# Altium PCB waffling80-NMB-USB.PcbDoc
Units mm, origin at the board's own origin, x right, y up, seen from the top; angles counter-clockwise.
Board outline 10.25 x 14.02 mm, 2 copper layers (Component Side, Bottom Layer), stack 1.171 mm thick; 4 components, 6 nets, 28 pads, 14 vias.
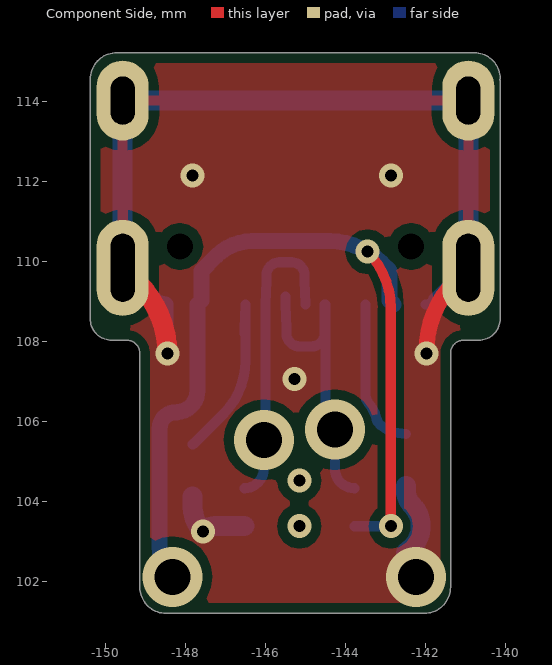
[diagram p0: Component Side view]
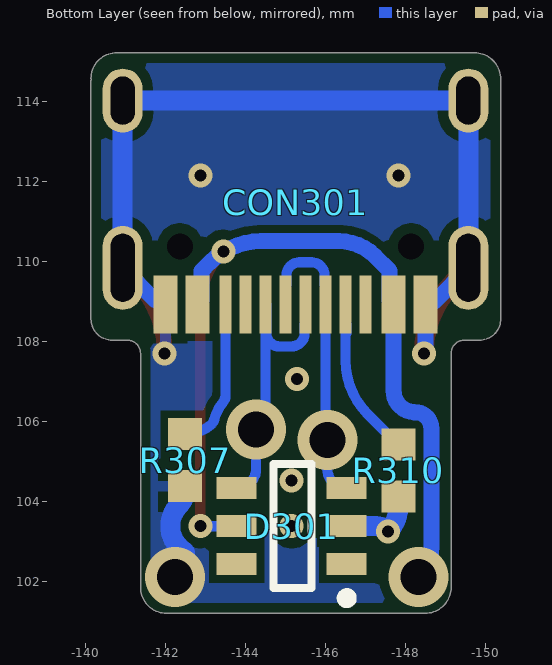
[diagram p1: Bottom Layer view, seen from below]

## Layer stack, top to bottom
Top Solder: solder mask 0.0102, Solder Resist, Dk 3.5
Component Side: signal copper 0.0356
Dielectric 1: core 1.1, FR-4, Dk 4.2
Bottom Layer: signal copper 0.0356
Solder Side: solder mask 0.0102, Solder Resist, Dk 3.5

## Board outline
-149.86,108.027 -149.479,108.027 cw(c-149.479,107.696) -149.148,107.696 -149.148,101.851 ccw(c-148.494,101.851) -148.494,101.197 -142.036,101.197 ccw(c-142.036,101.851) -141.381,101.851 -141.381,107.696 cw(c-141.051,107.696) -141.051,108.027 -140.67,108.027 ccw(c-140.67,108.554) -140.143,108.554 -140.143,114.513 ccw(c-140.193,114.513) -140.151,114.54 ccw(c-140.193,114.568) -140.142,114.568 ccw(c-140.786,114.568) -140.786,115.212 -149.726,115.212 ccw(c-149.726,114.551) -150.387,114.551 ccw(c-150.336,114.551) -150.383,114.533 ccw(c-150.337,114.513) -150.387,114.513 -150.387,108.554 ccw(c-149.86,108.554)

## Design rules (kind name [scope] priority, off if disabled: settings)
BoardOutlineClearance [All] p1: gap=0.254 ignorepadtopadclearanceinfootprint=FALSE except(0: Arc-SplitContinuation Track-SplitContinuation SMDPad-SplitContinuation THPad-SplitContinuation Via-SplitContinuation Fill-SplitContinuation Poly-SplitContinuation Region-SplitContinuation Text-SplitContinuation)
Clearance [All] p1: gap=0.2 ignorepadtopadclearanceinfootprint=FALSE except(0: Arc-Hole Track-Hole SMDPad-Hole THPad-Hole Via-Hole Fill-Hole Poly-Hole Region-Hole Text-Hole; 0.254: THPad-THPad THPad-Via THPad-Fill THPad-Poly THPad-Region THPad-Text Via-Via Via-Fill Via-Poly Via-Region Via-Text Fill-Fill Fill-Poly Fill-Region Fill-Text Poly-Poly Poly-Region Poly-Text Region-Region Region-Text Text-Text)
ComponentClearance [InComponent('No Component') And OnLayer('Component Side')] p1: gap=0.254 collisioncheckmode=3 verticalgap=0.254 showdistances=FALSE
DiffPairsRouting DiffPairsRouting_USB [InDifferentialPairClass('All Differential Pairs')] p1: maxlimit=0.254 minlimit=0.203 mostfreqgap=0.203 toplayer_minwidth=0.152 toplayer_maxwidth=0.381 toplayer_prefwidth=0.152 bottomlayer_minwidth=0.152 bottomlayer_maxwidth=0.381 bottomlayer_prefwidth=0.152 maxuncoupledlength=12.7
DiffPairsRouting [All] p2: maxlimit=0.254 minlimit=0.254 mostfreqgap=0.254 toplayer_minwidth=0.381 toplayer_maxwidth=0.381 toplayer_prefwidth=0.381 bottomlayer_minwidth=0.381 bottomlayer_maxwidth=0.381 bottomlayer_prefwidth=0.381 maxuncoupledlength=12.7
HoleSize [All] p1: absolutevalues=TRUE maxlimit=20 minlimit=0.025 maxpercent=80.000 minpercent=20.000
MatchedLengths MatchedLengths_USB_DiffPairs_1 [All] p1: tolerance=0.127 checknetsindiffpair=TRUE checkdiffpairvsdiffpair=FALSE checkxsignals=FALSE checkothers=FALSE
MatchedLengths MatchedLengths_USB_DiffPairs [All] p2: tolerance=0.127 checknetsindiffpair=TRUE checkdiffpairvsdiffpair=FALSE checkxsignals=FALSE checkothers=FALSE
PolygonConnect PolygonConnect_1 [All vs IsVia] p1: connectstyle=Direct reliefconductorwidth=0.254 reliefentries=4 polygonreliefangle="90 Angle" airgapwidth=0.254
PolygonConnect [All] p2: connectstyle=Relief reliefconductorwidth=0.254 reliefentries=4 polygonreliefangle="90 Angle" airgapwidth=0.254
RoutingVias [All] p1: holewidth=0.711 width=1.27 viastyle="Through Hole" minholewidth=0.711 minwidth=1.27 maxholewidth=0.711 maxwidth=1.27
SolderMaskExpansion [All] p1: expansion=0.102 istentingtop=FALSE
Width [All] p1: maxlimit=1 minlimit=0.203 preferedwidth=0.254 minimp=50.000000 maximp=50.000000 favimp=50.000000
27 further rules are at their usual default settings.

## Classes and differential pairs
differential pair D: +D_P -D_N

## Components (designator, comment, footprint, x,y, rotation, side; value= is the part's Value field where it differs from the comment)
CON301 "TYPE-C-31-M-12" TYPE-C-31-M-12 -145.257,108.92 r0 bottom
D301 "SRV05" SOT-23-6 -145.161,103.375 r0 bottom
R307 "Res1" R0603[1608] -142.494,105.026 r270 bottom value=5k1
R310 "Res1" R0603[1608] -147.828,104.772 r270 bottom value=5k1

## Footprints (in the part's own frame and the unit in brackets; to place one, negate y for a bottom-side part, rotate by r counter-clockwise, add the part's x,y. Pads: shape width x height; smd on the part's side, far side on the other; paste and mask are expansions set on the pad)
R0603[1608] [mm] "Chip Resistor, 2-Leads, Body 1,57x0,80mm, IPC Medium Density"
  rect 0.8x0.85 smd: 1(-0.65,0) 2(0.65,0)
  body extent -0.83,-0.43 0.82,0.43, height 0.5
SOT-23-6 [mm]
  rect 1x0.55 smd: 1(-1.375,0.95) 2(-1.375,0) 3(-1.375,-0.95) 4(1.375,-0.95) 5(1.375,0) 6(1.375,0.95)
  silkscreen extent -1.5,-1.55 0.46,1.92, body extent -1.37,-1.44 1.47,1.49, height 1.05
TYPE-C-31-M-12 [mm]
  rect 0.6x1.45 smd: A1B12(-3.25,0) A4B9(-2.45,0) B1A12(3.25,0) B4A9(2.45,0)
  rect 0.3x1.45 smd: A5(-1.25,0) A6(-0.25,0) A7(0.25,0) A8(1.25,0) B5(1.75,0) B6(0.75,0) B7(-0.75,0) B8(-1.75,0)
  oval 1x1.6 / inner oval 1x1.6 / far side oval 1.3x2 hole 0.6 slot 1.2 at 90 deg: S1(-4.32,-5.095) S1(4.32,-5.095)
  oval 1x2.1 / inner oval 1x2.1 / far side oval 1.3x2.4 hole 0.6 slot 1.7 at 90 deg: S1(-4.32,-0.915) S1(4.32,-0.915)
  round 0 hole 0.65 unplated: ""(-2.89,-1.445) ""(2.89,-1.445)
  body extent -4.48,-7.72 4.46,0.18, height 3.21

## Part data
CON301: LCSC MFG="Korean Hroparts Elec", LCSC Part #=C165948, MFG="Korean Hroparts Elec", MFGPN=TYPE-C-31-M-12, MRF.Part=TYPE-C-31-M-12
D301: LCSC MFG="ProTek Devices", LCSC Part #=C85364, MRF.Part=SRV05-4-P-T7
R307 R310: "Resistor", LCSC MFG="Uniroyal Elec", LCSC Part #=C23186, MFG="Panasonic Electronic Components", MFGPN=ERJ-3EKF5101V, MRF.Part=0603WAF5101T5E, Version="0603 imperial"

## Via types
v1: diameter 0.6, hole 0.3, Component Side to Bottom Layer, tented both sides, 10 vias
v2: diameter 1.5, hole 0.9, Component Side to Bottom Layer, 4 vias

## Nets (pads, with @x,y where several pads share a name; then routed paths per layer and width w, separated by ;. In a path a pad name is that pad's centre, name@x,y a point inside that pad or via, vN(x,y) a via of type N, cw(c..) or ccw(c..) an arc to the next point about the centre after c; other vN are vias at no path point)
D_N: CON301.A7 CON301.B7 D301.3 | length 7.7
  Bottom Layer w0.254: D301.3 ccw(c-146.536,104.811) -146.05,104.811 v2(-146.05,105.534) ccw(c-146.05,105.577) -146.007,105.577 CON301.B7 -145.984,109.518 -145.984,109.645 cw(c-145.657,109.645) -145.657,109.972 -145.357,109.972 cw(c-145.357,109.645) -145.03,109.645 -145.03,109.518 CON301.A7
D_P: CON301.A6 CON301.B6 D301.4 | length 8
  Bottom Layer w0.254: CON301.A6@-145.507,109.11 CON301.A6 -145.484,108.322 -145.484,108.195 ccw(c-145.157,108.195) -145.157,107.868 -144.857,107.868 ccw(c-144.857,108.195) -144.53,108.195 CON301.B6@-144.53,108.92 ; CON301.B6 -144.507,106.023 ccw(c-144.272,106.023) v2(-144.272,105.788) -144.272,104.811 ccw(c-143.786,104.811) D301.4
GND: CON301.A1B12 CON301.B1A12 CON301.S1 D301.2 R307.2 R310.2 | length 30.6
  Component Side w0.4: v1(-141.986,107.696) -141.986,107.734 cw(c-139.446,107.734) -141.242,109.53 CON301.S1@-140.937,109.835
  Component Side w0.5: CON301.S1@-149.577,109.835 -149.188,109.447 cw(c-150.939,107.696) v1(-148.463,107.696)
  Bottom Layer w0.254: CON301.B1A12 ccw(c-142.007,109.295) CON301.B1A12@-141.742,109.03
  Bottom Layer w0.4: CON301.S1@-149.577,109.835 -148.771,109.03 ccw(c-148.507,109.295) CON301.A1B12 -148.507,107.802 ccw(c-148.357,107.802) v1(-148.463,107.696) ; CON301.B1A12@-141.742,109.03 CON301.S1@-140.937,109.835
  Bottom Layer w0.5: CON301.S1@-149.577,109.835 -149.577,114.015 -140.937,114.015 CON301.S1@-140.937,109.835 ; R310.2 -147.828,103.861 ccw(c-146.961,103.861) v1(-147.574,103.248) cw(c-147.267,102.941) -147.267,103.375 D301.2 ; R307.2 -142.489,104.226 -142.489,104.191 ccw(c-141.994,104.262) -142.347,103.908 cw(c-142.875,103.375) -142.437,102.766 ccw(c-142.144,102.361) -142.494,102.718 ccw(c-141.627,102.718) v2(-142.24,102.105)
  other v1: -145.288,107.061 -147.828,112.141 -142.875,112.141
NetCON301_A5: CON301.A5 R310.1 | length 4.7
  Bottom Layer w0.254: R310.1 -147.816,105.422 -147.066,106.172 ccw(c-148.416,107.522) -146.507,107.522 CON301.A5 -146.53,108.322 CON301.A5@-146.53,108.195
NetCON301_B5: CON301.B5 R307.1 | length 3.8
  Bottom Layer w0.254: CON301.B5 -143.507,106.627 -143.505,106.625 ccw(c-143.251,106.642) -143.447,106.48 cw(c-144.272,105.788) -143.226,106.043 ccw(c-142.979,106.106) -143.144,105.912 ccw(c-142.494,106.689) -142.794,105.721 -142.792,105.721 R307.1
RAW: CON301.A4B9 CON301.B4A9 D301.5 | length 22.3
  Component Side w0.254: v1(-143.456,110.237) cw(c-144.859,108.834) -142.875,108.834 v1(-142.875,103.375)
  Bottom Layer w0.254: D301.5 v1(-142.875,103.375)
  Bottom Layer w0.4: v2(-148.336,102.105) cw(c-147.571,102.87) -148.653,102.87 -148.653,105.822 cw(c-148.253,105.822) -148.253,106.222 ccw(c-148.253,106.768) -148.245,106.222 ccw(c-148.253,106.768) -148.209,106.224 ccw(c-148.253,106.768) -147.707,106.768 CON301.A4B9 -147.607,109.02 -147.607,109.761 -147.238,110.13 cw(c-146.346,109.239) -146.346,110.499 -144.397,110.499 ; -144.397,110.499 cw(c-144.397,108.684) -143.113,109.968 -142.907,109.761 -142.907,109.02 CON301.B4A9
pads on no net: CON301. CON301.A8 CON301.B8 D301.1 D301.6
copper on no net:
  other v1: -145.161,103.375 -145.161,104.518

## Polygon pours and split planes (outlines as drawn)
GND on Bottom Layer (solid, pour order 1): -149.86,108.027 -149.479,108.027 cw(c-149.479,107.696) -149.148,107.696 -149.148,101.851 ccw(c-148.494,101.851) -148.494,101.197 -142.036,101.197 ccw(c-142.036,101.851) -141.381,101.851 -141.381,107.696 cw(c-141.051,107.696) -141.051,108.027 -140.67,108.027 ccw(c-140.67,108.554) -140.143,108.554 -140.143,114.513 ccw(c-140.193,114.513) -140.151,114.54 ccw(c-140.193,114.568) -140.142,114.568 ccw(c-140.786,114.568) -140.786,115.212 -149.726,115.212 ccw(c-149.726,114.551) -150.387,114.551 ccw(c-150.336,114.551) -150.383,114.533 ccw(c-150.337,114.513) -150.387,114.513 -150.387,108.554 ccw(c-149.86,108.554)
GND on Component Side (solid, pour order 0): -149.86,108.027 -149.479,108.027 cw(c-149.479,107.696) -149.148,107.696 -149.148,101.851 ccw(c-148.494,101.851) -148.494,101.197 -142.036,101.197 ccw(c-142.036,101.851) -141.381,101.851 -141.381,107.696 cw(c-141.051,107.696) -141.051,108.027 -140.67,108.027 ccw(c-140.67,108.554) -140.143,108.554 -140.143,114.513 ccw(c-140.193,114.513) -140.151,114.54 ccw(c-140.193,114.568) -140.142,114.568 ccw(c-140.786,114.568) -140.786,115.212 -149.726,115.212 ccw(c-149.726,114.551) -150.387,114.551 ccw(c-150.336,114.551) -150.383,114.533 ccw(c-150.337,114.513) -150.387,114.513 -150.387,108.554 ccw(c-149.86,108.554)

## Silkscreen, mask and mechanical layers (free items; w line width, h text height)
outline:
  lines w0.1: -150.337,112.208 -150.337,108.554 ; -150.337,114.513 -150.337,108.554 ; -150.336,114.551 cw(c-149.726,114.551) -149.726,115.161 -140.786,115.161 cw(c-140.786,114.568) -140.193,114.568 ; -140.193,114.513 -140.193,108.554 cw(c-140.67,108.554) -140.67,108.077 -141.051,108.077 ccw(c-141.051,107.696) -141.432,107.696 -141.432,106.296 -141.432,101.851 cw(c-142.036,101.851) -142.036,101.247 -148.494,101.247 cw(c-148.494,101.851) -149.098,101.851 -149.098,106.296 -149.098,107.696 ccw(c-149.479,107.696) -149.479,108.077 -149.86,108.077 cw(c-149.86,108.554) -150.337,108.554
Mechanical 3:
  drawing of 5676 lines, arcs and shapes, not listed
Mechanical 16:
  circle w0.013: c57.213,8.255 r1.994
  circle w0.013: c61.976,8.255 r1.994
  circle w0.013: c61.976,-6.985 r1.524
  circle w0.013: c57.213,-6.985 r1.524
  circle w0.013: c-38.1,-6.985 r1.524
  circle w0.013: c-38.1,8.255 r1.994
  circle w0.013: c5.112,0 r0.851
  circle w0.013: c6.858,0 r0.851
  circle w0.013: c3.842,2.54 r0.749
  circle w0.013: c15.748,2.54 r0.749
  circle w0.013: c17.018,0 r0.851
  circle w0.013: c11.938,0 r1.994
  circle w0.013: c9.398,5.08 r0.749
  circle w0.013: c-2.508,5.08 r0.749
  circle w0.013: c0.032,0 r1.994
  circle w0.013: c-5.048,0 r0.851
  circle w0.013: c-57.15,8.255 r1.994
  circle w0.013: c-57.15,-6.985 r1.524

## Text inside footprints (layer, text, board x,y; h text height)
CON301: Mechanical 16 "connector edge" at -148.207,116.17 h1 r180